# Altium PCB sv_wifi_car.PcbDoc
Units mil, origin at the board's own origin, x right, y up, seen from the top; angles counter-clockwise.
Board outline 1000 x 925 mil, 2 copper layers (Top Layer, Bottom Layer); 23 components, 27 nets, 86 pads, 13 vias.
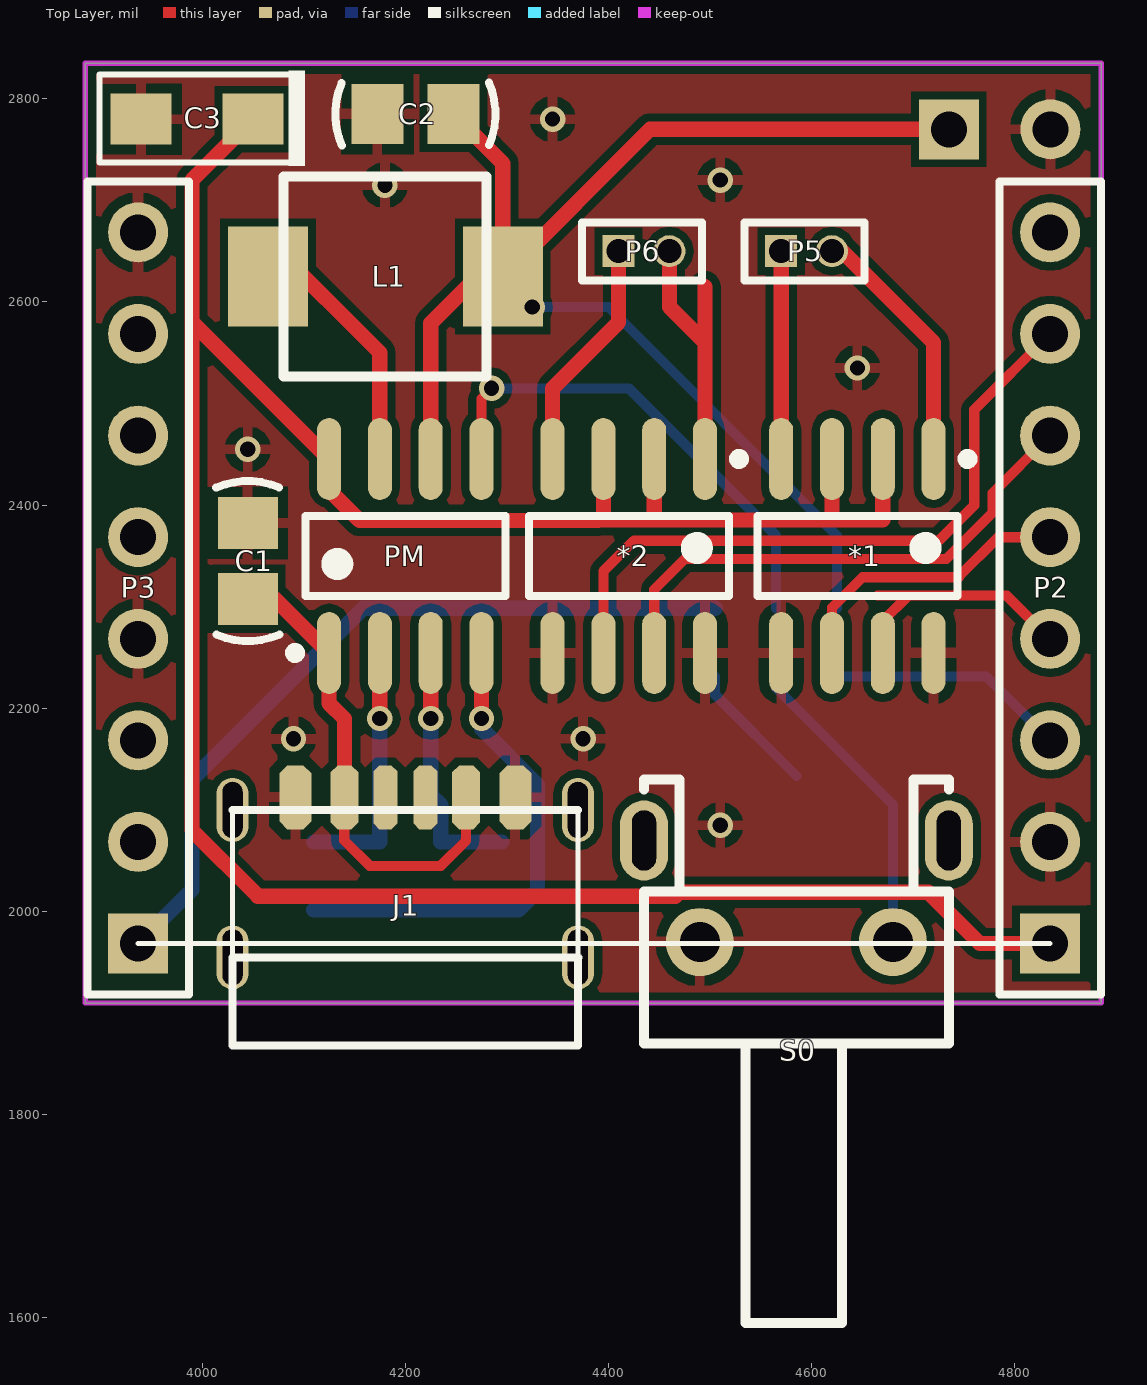
[diagram p0: Top Layer view]
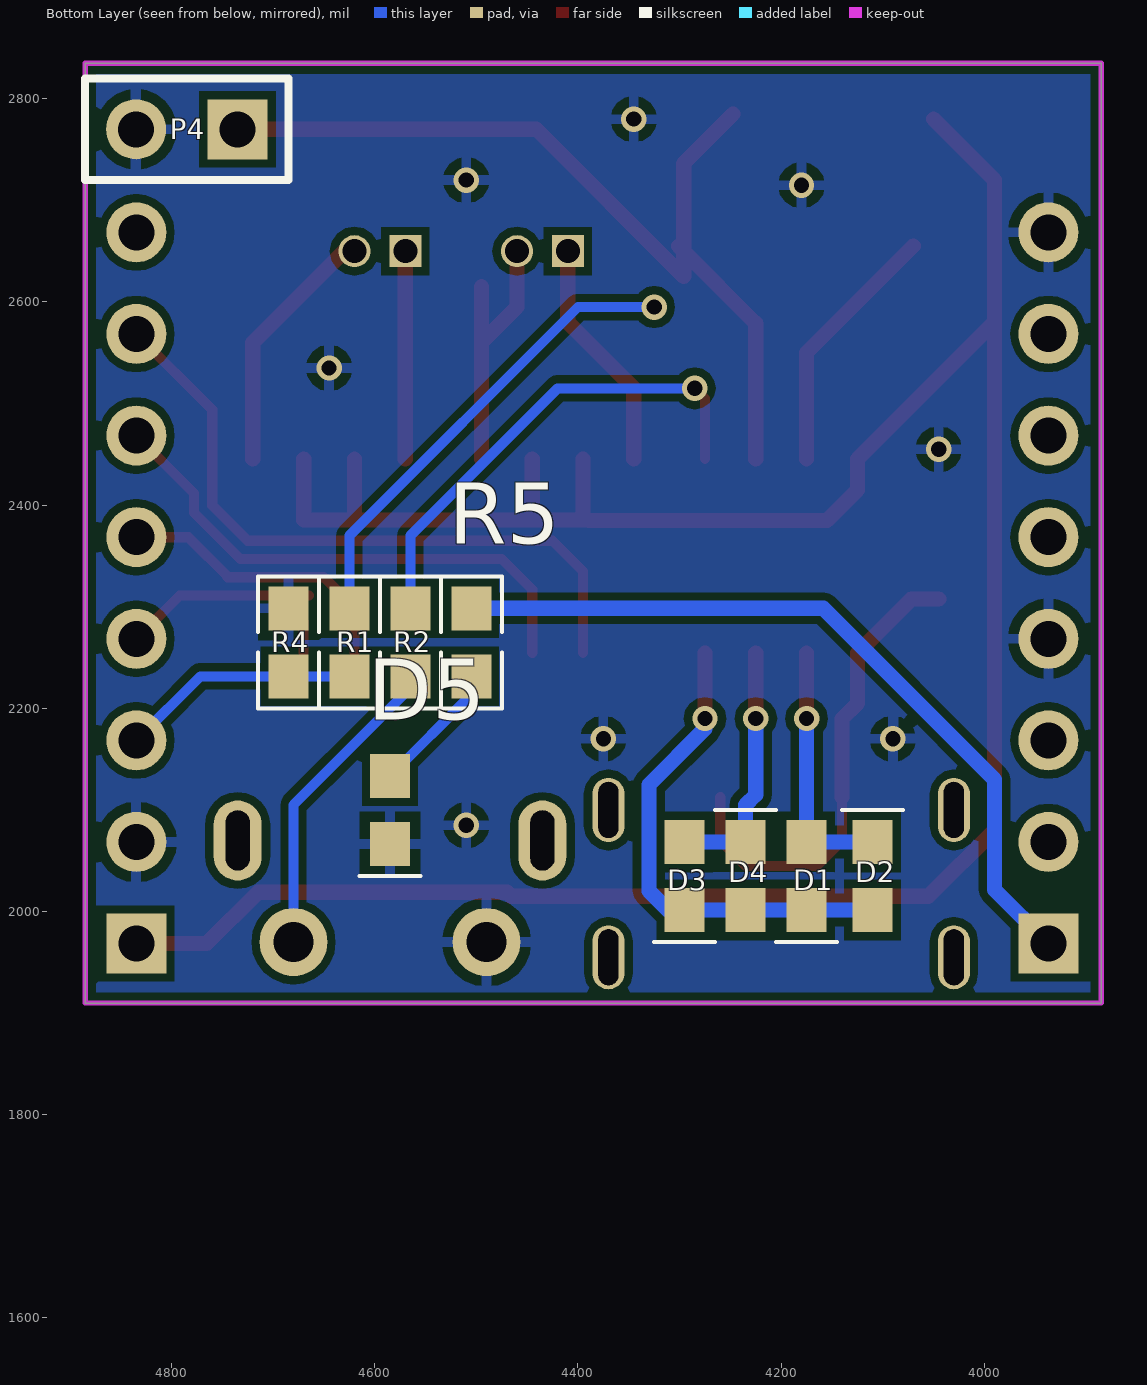
[diagram p1: Bottom Layer view, seen from below]

## Layer stack, top to bottom
Top Layer: signal copper 1.4
Dielectric: dielectric 12.6, FR-4, Dk 4.8
Bottom Layer: signal copper 1.4

## Board outline
3885,1910 4885,1910 4885,2835 3885,2835

## Design rules (kind name [scope] priority, off if disabled: settings)
Clearance Clearance_1 [All] p1: gap=8
Clearance [ispad vs ispad] p2: gap=2
PolygonConnect [All] p1: connectstyle=Relief reliefconductorwidth=10 reliefentries=4 polygonreliefangle="90 Angle" airgapwidth=10
RoutingVias [All] p1: holewidth=28 width=50 viastyle="Through Hole" minholewidth=28 minwidth=50 maxholewidth=28 maxwidth=50
SolderMaskExpansion [All] p1: expansion=4
Width [All] p1: maxlimit=15 minlimit=10 preferedwidth=10
28 further rules are at their usual default settings.

## Components (designator, comment, footprint, x,y, rotation, side; value= is the part's Value field where it differs from the comment)
*1 "L9110" SOP-8N 4645,2350 r270 top
*2 "L9110" SOP-8N 4420,2350 r270 top
C1 "Cap" C-RAD-0805 4045,2345 r270 top
C2 "Cap" C-RAD-0805 4210,2785 r0 top
C3 "Cap Pol" CAP-3216 3995,2780 r180 top
D1 "LED0" 0603-LED 4175,2035 r270 bottom
D2 "LED0" 0603-LED 4110,2035 r90 bottom
D3 "LED0" 0603-LED 4295,2035 r270 bottom
D4 "LED0" 0603-LED 4235,2035 r90 bottom
D5 "LED0" 0603-LED 4585,2100 r270 bottom
J1 "USB_C_6PIN" USB_C_6PIN_A 4030,1955 r0 top
L1 "Inductor" L-SMD-5 4180,2625 r0 top
P2 "Header 8" HDR1X8 4834.65,1968.5 r90 top
P3 "Header 8" HDR1X8 3937.01,1968.5 r90 top
P4 "Header 2" HDR2X1_A 4735,2770 r0 bottom
P5 "Header 2" "HDR2X1_A - 1.27" 4570,2650 r0 top
P6 "Header 2" "HDR2X1_A - 1.27" 4410,2650 r0 top
PM "ip5306" SOP-8N 4200,2350 r90 top
R1 "Res1" 0603-1 4625,2265 r90 bottom
R2 "Res1" 0603-1 4565,2265 r90 bottom
R4 "Res1" 0603-1 4685,2265 r270 bottom
R5 "Res1" 0603-1 4505,2265 r90 bottom
S0 "SW-PB" SW_PB2_C1 4585,1970 r180 top

## Footprints (in the part's own frame and the unit in brackets; to place one, negate y for a bottom-side part, rotate by r counter-clockwise, add the part's x,y. Pads: shape width x height; smd on the part's side, far side on the other; paste and mask are expansions set on the pad)
0603-1 [mm] "贴片带丝印"
  rect 1.1x1 smd: 1(-0.85,0) 2(0.85,0)
  silkscreen extent -1.65,-0.76 1.65,0.76, body extent -1.14,-0.38 1.14,0.38, height 1
0603-LED [mm]
  rect 1.1x1 smd: 1(-0.85,0) 2(0.85,0)
  silkscreen extent 1.65,-0.76 1.65,0.76, body extent -1.14,-0.38 1.14,0.38, height 1
C-RAD-0805 [mm] "贴片电容"
  rect 1.3x1.5 smd: 1(-0.95,0) 2(0.95,0)
  silkscreen extent -2,-0.79 2,0.79, body extent -1.27,-0.64 1.27,0.64, height 0.9
CAP-3216 [mil] "钽电容"
  rect 60x50 smd: 1(-55,0) 2(55,0)
  silkscreen extent -106,-48 96,46
HDR1X8 [mm] "Connector; Header; 8 Position"
  rect 1.5x1.5 hole 0.9: 1(0,0)
  round 1.5 hole 0.9: 2(2.54,0) 3(5.08,0) 4(7.62,0) 5(10.16,0) 6(12.7,0) 7(15.24,0) 8(17.78,0)
  silkscreen extent -1.27,-1.27 19.05,1.27
HDR2X1_A [mm] "Connector; Header; 2 Position"
  rect 1.5x1.5 hole 0.9: 1(0,0)
  round 1.5 hole 0.9: 2(2.54,0)
  silkscreen extent -1.27,-1.27 3.81,1.27
"HDR2X1_A - 1.27" [mm] "Connector; Header; 2 Position"
  rect 0.8x0.8 hole 0.6: 1(0,0)
  round 0.8 hole 0.6: 2(1.27,0)
  silkscreen extent -0.91,-0.74 2.08,0.71
L-SMD-5 [mm] "贴片电感5*5"
  rect 2x2.5 smd: 1(-2.921,0) 2(2.946,0)
  silkscreen extent -2.54,-2.5 2.54,2.5, body extent -2.54,-2.5 2.54,2.5, height 4
SOP-8N [mm] "SOP, 8-Leads, Body 5.00x4.00mm, Pitch 1.27mm, IPC Medium Density"
  oval 2.05x0.6 smd: 1(-2.425,1.905) 2(-2.425,0.635) 3(-2.425,-0.635) 4(-2.425,-1.905) 5(2.425,-1.905) 6(2.425,-0.635) 7(2.425,0.635) 8(2.425,1.905)
  silkscreen extent -2.55,-2.5 1,2.88, body extent -2,-2.5 2,2.5, height 2.65
SW_PB2_C1 [mm] "侧卧微动开关"
  round 1.7 hole 1: 1(-2.413,0) 2(2.413,0)
  oval 1.2x2 hole 0.6 slot 1.5 at 90 deg: 3(-3.81,-2.54) 4(3.81,-2.54)
  silkscreen extent -3.81,-4.06 3.81,9.53
USB_C_6PIN_A [mm] "USB方孔"
  oval 0.8x1.6 hole 0.5 slot 1.4 at 90 deg: 0(0,0) 0(0,3.683) 0(8.636,0) 0(8.636,3.683)
  oct 0.8x1.6 smd: 1(1.57,4) 6(7.07,4)
  oct 0.7x1.6 smd: 2(2.8,4) 5(5.84,4)
  oct 0.6x1.6 smd: 3(3.82,4) 4(4.82,4)
  silkscreen extent 0,-2.21 8.65,3.68, body extent 0.28,-1.47 8.48,3.96, height 2.68

## Part data
C1 C2: "无极性电容"
C3: "极性电解电容"
D1 D2 D3 D4 D5: "发光二极管"
J1: "USB C 接口"
L1: "电感"
P2 P3: "Header, 8-Pin"
P4 P5 P6: "接插件"
R1 R2 R4 R5: "贴片电阻"
S0: "微动开关"

## Via types
v1: diameter 25, hole 15, Top Layer to Bottom Layer, 13 vias

## Nets (pads, with @x,y where several pads share a name; then routed paths per layer and width w, separated by ;. In a path a pad name is that pad's centre, name@x,y a point inside that pad or via, vN(x,y) a via of type N, cw(c..) or ccw(c..) an arc to the next point about the centre after c; other vN are vias at no path point)
3.3V: P3.1 R5.2 | length 768.2
  Bottom Layer w15: P3.1 3990,2021.5 3990,2130 4158.46,2298.46 R5.2
5V: *1.2 *1.3 *2.2 *2.3 C3.1 P2.1 PM.8 | length 2641.9
  Top Layer w15: C3.1 3990,2720 3990,2580.47 ; *2.3 4395,2390.5 4400,2385.5 ; *2.2 4445,2390.5 4450,2385.5 ; *1.3 4620,2385.5 ; *1.2 4670,2385.5 4620,2385.5 ; P2.1 4765.42,1968.5 4714.96,2018.96 4469.72,2018.96 4465.88,2015.13 4054.87,2015.13 3990,2080 3990,2580.47 ; 3990,2580.47 PM.8 4125,2415 4155,2385 4390,2385 4390.5,2385.5 4400,2385.5 ; 4400,2385.5 4450,2385.5 ; 4450,2385.5 4620,2385.5
A1: *1.6 P2.5 | length 288.2
  Top Layer w10: *1.6 4620,2299 4650,2329 4744.91,2329 ; 4744.46,2329.46 4783.5,2368.5 P2.5
A2: *2.6 P2.7 | length 671.8
  Top Layer w10: *2.6 4395,2335 4425,2365 4725,2365 4760,2400 4760,2493.86 P2.7
B1: *1.7 P2.4 | length 254.1
  Top Layer w10: 4665,2311 4792.15,2311 P2.4 ; *1.7 4670,2286 4695,2311
B2: *2.7 P2.6 | length 526.2
  Top Layer w10: *2.7 4445,2317 4475,2347 4732.46,2347 4778,2392.54 4778,2411.86 P2.6
BAT: P2.3 R1.1 R4.2 | length 235.8
  Bottom Layer w10: R1.1 R4.2 4771.61,2231.54 P2.3
GND: *1.5 *1.8 *2.5 *2.8 C1.1 C2.1 C3.2 D5.2 J1.1 J1.6 P2.2 P3.4 P3.8 P4.2 R4.1 S0.2
  other v1: 4510,2085 4090,2170 4375,2170 4045,2455 4645,2535 4180,2715 4510,2720 4345,2780
IO0: P3.3
IO4: P2.8 | length 16.9
  Bottom Layer w10: P2.8 P2.8@4834.65,2685.35
IO16: P3.2
Net*1_1: *1.1 P5.2 | length 251.8
  Top Layer w15: P5.2 4630,2650 4720,2560 *1.1
Net*1_4: *1.4 P5.1 | length 204.5
  Top Layer w15: *1.4 P5.1
Net*2_1: *2.1 P6.2 | length 274
  Top Layer w15: P6.2 4460,2595 4495,2560 ; *2.1 4495,2560 ; 4495,2615 4495,2560
Net*2_4: *2.4 P6.1 | length 231.5
  Top Layer w15: *2.4 4345,2515 4410,2580 P6.1
NetD1_1: D1.1 D2.2 PM.2 | length 251.1
  Top Layer w15: v1(4175,2190) PM.2
  Bottom Layer w15: D2.2 D1.1 v1(4175,2190)
NetD1_2: D1.2 D2.1 D3.2 D4.1 PM.4 | length 485.1
  Top Layer w15: v1(4275,2190) PM.4
  Bottom Layer w15: D2.1 D4.1 D3.2 4311.54,2001.54 4330.19,2020.19 4330.19,2124.81 4275,2180 v1(4275,2190)
NetD3_1: D3.1 D4.2 PM.3 | length 250.2
  Top Layer w15: v1(4225,2190) PM.3
  Bottom Layer w15: v1(4225,2190) 4225,2115 4235,2105 D4.2 D3.1
NetD5_1: D5.1 R5.1 | length 131.2
  Bottom Layer w10: R5.1 4505,2213.46 D5.1
NetL1_1: L1.1 PM.7 | length 253
  Top Layer w15: L1.1@4070,2655 4175,2550 PM.7
NetPM_5: PM.5 R2.2 | length 485.3
  Top Layer w10: PM.5 4275,2505 v1(4285,2515)
  Bottom Layer w10: v1(4285,2515) 4420,2515 4565,2370 R2.2
NetR2_1: R2.1 S0.1 | length 309.2
  Bottom Layer w10: R2.1 4565,2220 4680,2105 S0.1
U0R: P3.6
U0T: P3.7
VBAT: C2.2 L1.2 P4.1 PM.6 R1.2 | length 1384.9
  Top Layer w15: PM.6 4225,2579 L1.2@4296,2650 ; C2.2 4296,2736.4 L1.2@4296,2650 ; L1.2@4301,2655 L1.2@4296,2650 ; P4.1 4441,2770 L1.2 L1.2@4296,2650
  Bottom Layer w10: v1(4325,2595) 4400,2595 4625,2370 R1.2
VBUS: C1.2 J1.2 J1.5 PM.1 | length 476.1
  Top Layer w10: J1.2 4140,2112.24 4140,2070 4165,2045 4235,2045 4259.92,2069.92 J1.5
  Top Layer w15: C1.2 4071.93,2307.6 PM.1 4125,2205 4140.24,2189.76 J1.2
VCC: P3.5
pads on no net: J1.0 J1.3 J1.4 S0.3 S0.4

## Polygon pours and split planes (outlines as drawn)
GND on Top Layer "Top Layer-No Net" (solid, remove dead copper, pour order 4): 3885,2835 4885,2835 4885,1910 3885,1910
GND on Bottom Layer "Top Layer-No Net" (solid, remove dead copper, pour order 6): 3885,2835 4885,2835 4885,1910 3885,1910

## Keep-outs
Keep-Out Layer:
  the board outline again, w5

## Silkscreen, mask and mechanical layers (free items; w line width, h text height)
Top Overlay:
  lines w5: 3937.01,1968.5 4834.65,1968.5